# EAGLE board quahog-3-routed (EAGLE 7.6.0)
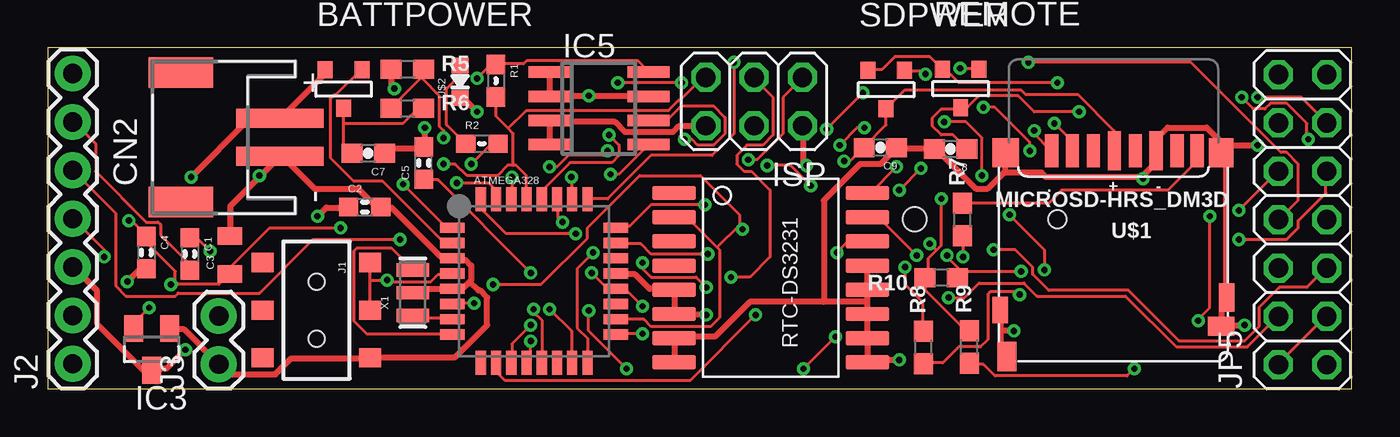
[diagram p0: board, top side]
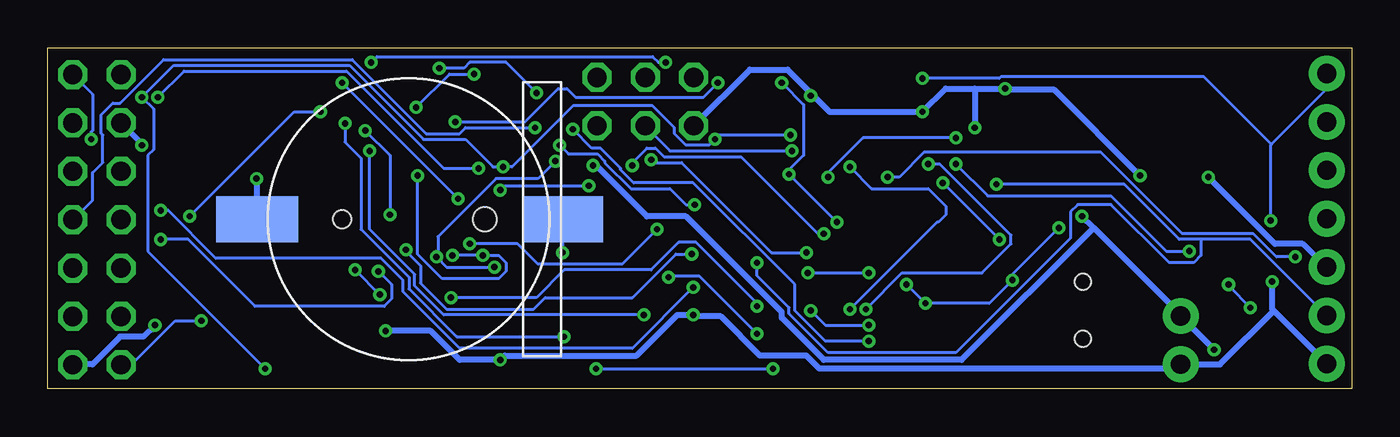
[diagram p1: board, bottom side, seen from below]

Size 68.5 x 17.92 mm. Coordinates in mm from the lower left corner, seen from the top.
Outline: 0,0 68.5,0 68.5,17.92 0,17.92 0,0
Copper layers (1*16): Top 0.0356mm / dielectric 1.5011mm / Bottom 0.0356mm
Design rules "oshpark-2layer": minimum track width 6mil, minimum drill 13mil, track to track 6mil, track to pad 6mil, pad to pad 6mil, via to via 6mil, smd to smd 6mil, copper to edge 15mil, drill to drill 6mil, minimum pad ring 7mil, minimum via ring 7mil, stop-mask expansion 2.5mil, vias tented up to drill 0mil, thermal gap 10mil
Net classes: 1 power: width 0.305 mm

## Footprints (pad centres in the part's own frame; a part is rotated, then mirrored left to right if it is on the bottom)
TQFP32-08 = smd 1.27 x 0.533: 1 -4.293,2.8; 2 -4.293,2; 3 -4.293,1.2; 4 -4.293,0.4; 5 -4.293,-0.4; 6 -4.293,-1.2; 7 -4.293,-2; 8 -4.293,-2.8; 17 4.293,-2.8; 18 4.293,-2; 19 4.293,-1.2; 20 4.293,-0.4; 21 4.293,0.4; 22 4.293,1.2; 23 4.293,2; 24 4.293,2.8 | smd 0.533 x 1.27: 9 -2.8,-4.293; 10 -2,-4.293; 11 -1.2,-4.293; 12 -0.4,-4.293; 13 0.4,-4.293; 14 1.2,-4.293; 15 2,-4.293; 16 2.8,-4.293; 25 2.8,4.293; 26 2,4.293; 27 1.2,4.293; 28 0.4,4.293; 29 -0.4,4.293; 30 -1.2,4.293; 31 -2,4.293; 32 -2.8,4.293
BATTCON_12MM_SMT = smd 2.4 x 4.3: P$1 0,11.96 | smd 2.4 x 4.2: P$2 0,-4.1 | hole 0.95: 0,7.5 | hole 1.25: 0,0
SOT-23 = smd 0.787 x 0.889: 1 0.025,-1.016; 2 -0.94,1.016; 3 0.991,1.016
0603-CAP = smd 1.016 x 0.965: 1 -0.85,0; 2 0.85,0
0805-CAP = smd 0.902 x 1.3: 1 -1,0; 2 1,0
0603-CAP' = smd 1.1 x 1: 1 -0.85,0; 2 0.85,0
JST-PH-2-SMT-RA = smd 1 x 4.6: 1 1,-3.7; 2 -1,-3.7 | smd 1.6 x 3.4: NC1 -3.4,1.5; NC2 3.4,1.5
SOT23 = smd 1 x 1.4: 1 -0.95,-1.1; 2 0.95,-1.1; 3 0,1.1
SO-08 = smd 0.6 x 2.2: 1 -1.905,-2.6; 2 -0.635,-2.6; 3 0.635,-2.6; 4 1.905,-2.6; 5 1.905,2.6; 6 0.635,2.6; 7 -0.635,2.6; 8 -1.905,2.6
2X03 = drill 1.016 octagon: 1 -2.54,-1.27; 2 -2.54,1.27; 3 0,-1.27; 4 0,1.27; 5 2.54,-1.27; 6 2.54,1.27
AYZ0202 = smd 1 x 1.15: 1 -2.5,2.825; 2 0,2.825; 3 2.5,2.825; 4 -2.5,-2.825; 5 0,-2.825; 6 2.5,-2.825 | hole 0.85: 1.5,0; -1.5,0
1X07 = drill 1.016 pad 1.88: 1 0,0; 2 2.54,0; 3 5.08,0; 4 7.62,0; 5 10.16,0; 6 12.7,0; 7 15.24,0
1X02 = drill 1.016 pad 1.88: 1 0,0; 2 2.54,0
2X07 = drill 1.016 octagon: 1 -7.62,-1.27; 2 -7.62,1.27; 3 -5.08,-1.27; 4 -5.08,1.27; 5 -2.54,-1.27; 6 -2.54,1.27; 7 0,-1.27; 8 0,1.27; 9 2.54,-1.27; 10 2.54,1.27; 11 5.08,-1.27; 12 5.08,1.27; 13 7.62,-1.27; 14 7.62,1.27
0603-RES = smd 1.016 x 0.965: 1 -0.85,0; 2 0.85,0
0603-NO = smd 1.1 x 1: 1 -0.85,0; 2 0.85,0
DS3231 = smd 0.762 x 2.286: 1 -4.445,-5.08; 2 -3.175,-5.08; 3 -1.905,-5.08; 4 -0.635,-5.08; 5 0.635,-5.08; 6 1.905,-5.08; 7 3.175,-5.08; 8 4.445,-5.08; 9 4.445,5.08; 10 3.175,5.08; 11 1.905,5.08; 12 0.635,5.08; 13 -0.635,5.08; 14 -1.905,5.08; 15 -3.175,5.08; 16 -4.445,5.08
DM3D = smd 0.7 x 1.75: CD/DAT3 8.15,0.45; CLK 4.85,0.45; CMD 7.05,0.45; DAT0 2.65,0.45; DAT1 1.6,0.45; DAT2 9.25,0.45 | smd 0.8 x 1.5: GND1 0.05,8.15 | smd 0.8 x 1.4: GND2 11.95,8.8 | smd 1.4 x 1.5: GND3 11.65,0.55 | smd 1.3 x 1.5: GND4 0.35,0.55 | smd 1 x 1.55: SW_A 11.6,11.25 | smd 1.4 x 1: SW_B 0.35,9.65 | smd 0.7 x 2.032: VDD 5.95,0.45; VSS 3.75,0.45
0603-LED = smd 0.8 x 0.9: MINUS -0.85,0; PLUS 0.85,0
RESONATOR-SMD = smd 0.7 x 1.7: 1 -1.2,0; 2 0,0; 3 1.2,0

## Placement (x,y rotation side)
ATMEGA328  ATMega-328  [TQFP32-08]  25.55,5.66 0 top
BAT  CR1220  [BATTCON_12MM_SMT]  45.54,8.92 90 bottom
BATTPOWER  FDN340P  [SOT-23]  15.52,15.75 0 top
C1  0.1  [0603-CAP]  7.47,7.09 270 top
C2  1u  [0603-CAP]  16.66,9.55 0 top
C3  10u  [0805-CAP]  9.58,7.04 90 top
C4  0.1  [0603-CAP]  5.18,7.16 270 top
C5  0.1  [0603-CAP]  19.76,11.86 90 top
C7  0.1uF  [0603-CAP']  16.84,12.37 180 top
C8  0.1uF  [0603-CAP']  47.42,12.6 180 top
C9  0.1uF  [0603-CAP']  43.74,12.67 180 top
CN2  [JST-PH-2-SMT-RA]  8.51,13.21 90 top
IC3  MCP1703CB  [SOT23]  5.46,2.08 180 top
IC5  24AA128SN  [SO-08]  28.96,14.73 270 top
ISP  [2X03]  37.11,15.09 180 top
J1  AYZ0202  [AYZ0202]  14.12,4.14 270 top
J2  [1X07]  1.32,1.32 90 top
J3  [1X02]  8.99,1.3 90 top
JP5  [2X07]  65.91,8.89 90 top
R1  10k  [0603-RES]  23.55,16.18 270 top
R2  1k5  [0603-RES]  22.81,12.88 0 top
R5  100K  [0603-NO]  18.9,16.79 0 top
R6  100K  [0603-NO]  18.9,14.73 0 top
R7  10K  [0603-NO]  48.06,8.89 90 top
R8  10K  [0603-NO]  46,2.18 90 top
R9  1.4K  [0603-NO]  48.41,2.21 90 top
R10  1.4K  [0603-NO]  46.94,5.84 180 top
REMOTE  FDN340P  [SOT-23]  47.93,15.77 0 top
RTC-DS3231  DS3231  [DS3231]  37.97,5.84 270 top
SDPWER  FDN340P  [SOT-23]  44.02,15.72 0 top
U$1  MICROSD-HRS_DM3D  [DM3D]  61.98,12.95 180 top
U$2  LED0603  [0603-LED]  21.67,16.13 90 top
X1  16 MHz  [RESONATOR-SMD]  19.18,5.05 90 top

## Library data of the parts
ATMEGA328 C1-C5 R1 R2 U$2 = LowPowerLab
BAT J1 = SparkFunNew
BATTPOWER REMOTE SDPWER = zetex; OC_FARNELL: unknown; OC_NEWARK: unknown
C7-C9 X1 = SparkFun
CN2 = adafruit
IC3 = linear
IC5 = microchip; MF: MICROCHIP; MPN: 24AA128-I/SN; OC_FARNELL: unknown; OC_NEWARK: 92C6842
ISP JP5 = pinhead
J2 J3 = SparkFun-Connectors
R5-R10 = microbuilder
RTC-DS3231 = _lh-library
U$1 = hrs_DM3D-SF

## Nets
A0: ATMEGA328.23 JP5.5
A1: ATMEGA328.24 JP5.7
A2: ATMEGA328.25 JP5.8
A3: ATMEGA328.26 R5.2 R6.1
A6: ATMEGA328.19
A7: ATMEGA328.22
AREF: ATMEGA328.20 C5.1 JP5.4
D0_RX: ATMEGA328.30 J2.4
D1_TX: ATMEGA328.31 J2.5
D2: ATMEGA328.32 JP5.13
D3: ATMEGA328.1 J2.2 JP5.10
D4: ATMEGA328.2 BATTPOWER.3
D5: ATMEGA328.9
D5/RTC: RTC-DS3231.3
D6: ATMEGA328.10 SDPWER.3
D7: ATMEGA328.11 U$1.CD/DAT3
D8: ATMEGA328.12 REMOTE.3
D9: ATMEGA328.13 R2.2
D10: JP5.6
D10_SS: ATMEGA328.14
D11_MOSI: ATMEGA328.15 ISP.4
D12_MISO: ATMEGA328.16 ISP.1
D13_SCK: ATMEGA328.17 ISP.3
GND [power]: ATMEGA328.3 ATMEGA328.5 ATMEGA328.21 BAT.P$1 C2.2 C3.2 C4.2 C5.2 C7.1 C8.2 C9.1 CN2.2 IC3.1 IC5.1 IC5.2 IC5.3 IC5.4 IC5.7 ISP.6 J1.3 J2.1 J3.1 JP5.1 JP5.12 R5.1 RTC-DS3231.5 RTC-DS3231.6 RTC-DS3231.7 RTC-DS3231.8 RTC-DS3231.9 RTC-DS3231.10 RTC-DS3231.11 RTC-DS3231.12 RTC-DS3231.13 U$1.GND1 U$1.GND2 U$1.GND3 U$1.GND4 U$1.SW_A U$1.SW_B U$1.VSS U$2.MINUS X1.2
MISO: U$1.DAT0
MOSI: U$1.CMD
N$1: ATMEGA328.7 X1.1
N$2: R2.1 U$2.PLUS
N$4: C9.2 R7.1 R8.2 SDPWER.1 U$1.VDD
N$7: C8.1 JP5.2 JP5.3 REMOTE.1
N$15: BATTPOWER.1 C7.2 R6.2
N$16: R7.2 U$1.DAT1
N$18: R8.1 U$1.DAT2
N$20: C1.2 J2.6
N$21: ATMEGA328.8 X1.3
PWR [power]: BATTPOWER.2 C2.1 CN2.1 IC3.3 ISP.2 J2.3 J3.2
RST: ATMEGA328.29 C1.1 ISP.5 R1.2
RTC_BATT: BAT.P$2 RTC-DS3231.14
SCK: U$1.CLK
SCL: ATMEGA328.28 IC5.6 JP5.11 R9.1 RTC-DS3231.16
SDA: ATMEGA328.27 IC5.5 JP5.9 R10.1 RTC-DS3231.15
VBAT [power]: JP5.14
VCC: ATMEGA328.4 ATMEGA328.6 ATMEGA328.18 C3.1 C4.1 IC3.2 IC5.8 J1.1 J1.2 J2.7 R1.1 R9.2 R10.2 REMOTE.2 RTC-DS3231.2 SDPWER.2

## Tracks (layer width: path | path; a pad name or v marks a point on that pad's centre or on a via)
A0  (via drill 0.33)
  Top 0.152: v34.67,7.09 31.7,7.09 31.17,7.62 29.87,7.62 ATMEGA328.23 | v49.68,7.32 50.83,7.32 51.74,6.4 51.74,6.02 52.58,5.18 56.77,5.18 59.44,2.52 62.87,2.52 63.63,3.28 63.63,4.27 64.69,5.33 66.14,5.33 67.13,6.33 JP5.5
  Bottom 0.152: v34.67,7.09 35.51,7.09 37.8,4.8 42.37,4.8 42.98,4.19 47.55,4.19 48.92,5.56 48.92,6.48 49.68,7.24 v49.68,7.32
A1  (via drill 0.33)
  Top 0.152: v34.52,9.68 31.7,9.68 30.56,8.53 29.87,8.53 ATMEGA328.24 | v41.61,12.8 42.52,13.72 v42.9,13.72
  Bottom 0.152: v34.52,9.68 34.98,9.68 35.81,10.52 37.87,10.52 39.24,11.89 39.24,11.96 39.62,12.34 41.15,12.34 v41.61,12.8 | v42.9,13.72 46.56,13.72 46.86,13.41 48.62,13.41 52.5,17.3 62.41,17.3 64.69,15.01 65.07,15.01 65.68,14.4 65.68,13.41 65.61,13.34 65.61,11.89 66.14,11.35 66.14,9.91 67.13,8.91 JP5.7
A2  (via drill 0.33)
  Top 0.152: v36.04,17.14 36.04,13.41 34.9,12.27 31.7,12.27 29.41,9.98 28.42,9.98 ATMEGA328.25 | v51.51,17.14 60.05,17.14 64.77,12.42 65.07,12.42 65.68,11.81 65.68,9.91 64.69,8.91 JP5.8
  Bottom 0.152: v36.04,17.14 36.42,17.14 36.73,17.45 51.21,17.45 v51.51,17.14
A3  (via drill 0.33)
  Top 0.152: R6.1 18.06,14.78 19.74,16.46 19.74,16.76 R5.2 19.66,16.31 20.57,15.39 20.57,13.79 20.8,13.56 v20.8,13.18 | v27.51,11.12 27.51,9.98 ATMEGA328.26
  Bottom 0.152: v27.51,11.12 27.51,11.35 25.68,13.18 v20.8,13.18
AREF  (via drill 0.33)
  Top 0.152: v25.37,6.1 20.5,10.97 19.81,10.97 C5.1 | v28.57,6.1 29.34,5.33 29.79,5.33 ATMEGA328.20 29.87,5.26 30.33,5.26 v31.24,4.34 | v47.32,4.8 48.16,4.8 48.92,5.56 51.28,5.56 51.97,4.88 56.62,4.88 59.28,2.21 63.02,2.21 64.62,3.81 JP5.4
  Bottom 0.152: v28.57,6.1 v25.37,6.1 | v47.32,4.8 42.82,4.8 41.38,6.25 36.8,6.25 35.36,7.7 34.44,7.7 31.24,4.5 v31.24,4.34
D0_RX  (via drill 0.33)
  Top 0.152: v24.38,11.12 24.38,9.98 ATMEGA328.30 | v2.97,6.93 2.97,7.32 1.37,8.91 J2.4
  Bottom 0.152: v24.38,11.12 23.77,11.12 22.48,12.42 13.18,12.42 8.91,8.15 5.18,8.15 3.96,6.93 v2.97,6.93
D1_TX  (via drill 0.33)
  Top 0.152: v21.49,10.82 23.16,10.82 23.55,10.44 23.55,9.98 ATMEGA328.31 | v18.52,7.85 13.95,7.85 11.12,5.03 6.86,5.03 6.71,4.88 4.11,4.88 3.58,5.41 3.58,9.22 J2.5
  Bottom 0.152: v18.52,7.85 v21.49,10.82
D2  (via drill 0.33)
  Top 0.152: v27.74,8.15 24.08,8.15 22.78,9.45 22.78,9.91 ATMEGA328.32 | v37.8,11.73 39.01,11.73 v40.08,10.67 | v45.87,11.58 v44.73,10.44 | v62.71,15.32 63.32,14.71 63.93,14.71 64.24,15.01 65.07,15.01 66.14,13.95 66.14,13.18 v66.22,13.11
  Bottom 0.152: v27.74,8.15 28.04,8.15 32.08,12.19 36.12,12.19 36.58,12.65 37.03,12.65 37.8,11.89 v37.8,11.73 | v40.08,10.67 44.5,10.67 v44.73,10.44 | v45.87,11.58 47.7,11.58 52.81,16.69 61.34,16.69 v62.71,15.32 | v66.22,13.11 66.22,13.49 66.14,13.56 66.14,15.47 JP5.13
D3  (via drill 0.33)
  Top 0.152: v18.67,10.74 20.88,8.53 21.26,8.53 ATMEGA328.1 | v62.56,9.37 64.62,11.43 JP5.10 | v34.6,5.33 34.06,5.87 31.7,5.87 31.24,6.33 v31.24,6.63
  Bottom 0.152: v18.67,10.74 11.96,10.74 9.07,7.85 7.92,7.85 | 7.92,7.85 5.33,7.85 1.37,3.89 J2.2 | v62.56,9.37 62.18,9.37 59.66,6.86 50.98,6.86 49.84,5.71 49.84,5.11 46.86,2.13 37.8,2.13 v34.6,5.33 | v31.24,6.63 31.24,5.94 29.57,4.27 29.57,3.96 27.51,1.91 20.8,1.91 14.78,7.92 14.78,9.3 14.4,9.68 12.65,9.68 9.6,6.63 8.31,6.63 7.92,7.01 7.92,7.85
D4
  Top 0.152: BATTPOWER.3 16.46,16.76 15.16,15.47 15.09,15.47 14.86,15.24 14.86,12.12 16.08,10.9 17.6,10.9 20.8,7.7 21.26,7.7 ATMEGA328.2
D6  (via drill 0.33)
  Top 0.152: v46.1,16.54 45.95,16.69 45.03,16.69 SDPWER.3 | v49.15,14.78 49.76,14.78 51.59,12.95 v51.59,12.5 | v37.19,3.89 33.76,0.46 24,0.46 23.62,0.84 23.62,1.37 ATMEGA328.10
  Bottom 0.152: v46.1,16.54 47.4,16.54 v49.15,14.78 | v51.59,12.5 51.59,8.38 49.23,6.02 49.23,5.41 47.7,3.89 v37.19,3.89
D7  (via drill 0.33)
  Top 0.152: v25.37,3.35 24.38,2.36 24.38,1.37 ATMEGA328.11 | v28.42,4.12 28.42,3.05 v30.4,1.07 | v41.38,2.74 v39.7,1.07 | v52.88,13.95 53.8,13.03 53.8,12.57 U$1.CD/DAT3
  Bottom 0.152: v25.37,3.35 27.66,3.35 v28.42,4.12 | v39.7,1.07 v30.4,1.07 | v41.38,2.74 47.02,2.74 49.53,5.26 49.53,5.87 52.05,8.38 52.05,12.12 52.88,12.95 v52.88,13.95
D8  (via drill 0.33)
  Top 0.152: v47.93,16.84 48.92,16.84 REMOTE.3 | v40.92,13.64 v42.82,15.54 | v25.37,2.52 25.37,1.52 25.22,1.37 ATMEGA328.12
  Bottom 0.152: v47.93,16.84 46.63,16.84 46.33,17.14 44.43,17.14 v42.82,15.54 | v40.92,13.64 39.93,12.65 39.47,12.65 38.41,11.58 38.41,11.51 37.72,10.82 34.6,10.82 29.26,5.49 29.26,4.12 27.66,2.52 v25.37,2.52
D9  (via drill 0.33)
  Top 0.152: R2.2 23.32,12.88 v22.25,11.81 | v25.53,4.19 25.53,4.04 25.98,3.58 25.98,1.37 ATMEGA328.13
  Bottom 0.152: v22.25,11.81 21.64,11.81 17.91,8.08 17.91,7.62 19.43,6.1 23.62,6.1 v25.53,4.19
D11_MOSI  (via drill 0.33)
  Top 0.152: v26.36,4.19 27.51,3.05 27.51,1.37 ATMEGA328.15 | v26.36,11.66 26.75,11.66 27.36,12.27 29.18,12.27 v29.41,12.5
  Bottom 0.152: v26.36,4.19 21.79,8.76 21.72,8.76 21.34,9.14 21.34,9.6 22.25,10.52 25.22,10.52 v26.36,11.66 | v29.41,12.5 35.81,12.5 37.11,13.79 ISP.4
D12_MISO  (via drill 0.33)
  Top 0.152: v28.65,7.16 27.81,6.33 27.81,3.2 28.35,2.67 ATMEGA328.16 | v36.8,12.04 37.26,12.04 38.63,13.41 38.63,15.32 39.62,16.31 ISP.1
  Bottom 0.152: v28.65,7.16 30.48,7.16 35.2,11.89 36.65,11.89 v36.8,12.04
D13_SCK  (via drill 0.33)
  Top 0.152: v31.24,2.9 29.87,2.9 ATMEGA328.17 | v35.89,5.87 36.88,5.87 37.95,6.93 37.95,10.44 36.96,11.43 36.58,11.43 36.2,11.81 36.2,12.27 36.73,12.8 37.57,12.8 38.1,13.34 38.1,15.32 37.11,16.31 ISP.3
  Bottom 0.152: v31.24,2.9 34.29,5.94 35.81,5.94 v35.89,5.87
GND  (via drill 0.33)
  Top 0.305: ATMEGA328.21 29.87,6.02 30.86,6.02 31.62,5.26 32.84,5.26 RTC-DS3231.5 32.92,5.11 32.92,3.96 RTC-DS3231.6 33,3.89 v34.6,3.89 | RTC-DS3231.8 32.92,1.45 32.92,2.67 RTC-DS3231.7 33,2.74 35.05,2.74 36.88,4.57 40.77,4.57 | 50.06,3.05 50.06,2.06 50.37,1.75 U$1.SW_A | 50.06,3.05 50.06,4.12 U$1.GND2 | 43.05,4.57 RTC-DS3231.11 RTC-DS3231.10 RTC-DS3231.9 43.13,1.52 v44.73,1.52 | 43.05,4.57 RTC-DS3231.12 RTC-DS3231.13 | v50.75,3.05 50.06,3.05 | 43.05,4.57 40.77,4.57 | 50.29,11.43 50.29,12.34 U$1.GND3 | 50.29,11.43 49.38,10.52 48.77,10.52 46.71,12.57 C8.2 46.56,12.65 44.65,12.65 C9.1 44.5,12.57 43.74,11.81 42.67,11.81 40.77,9.91 40.77,4.57 | U$1.GND4 61.57,12.42 61.57,13.03 60.88,13.72 58.83,13.72 58.29,13.18 58.29,12.57 U$1.VSS 58.14,12.42 58.14,11.81 57.46,11.12 | U$1.GND4 61.65,12.27 61.87,12.04 61.87,4.95 U$1.GND1 61.87,4.8 61.65,4.57 61.65,3.35 U$1.SW_B 61.8,3.35 v62.87,3.35 | v63.55,12.8 61.65,12.8 U$1.GND4 | 57.46,11.12 52.43,11.12 52.2,11.35 50.37,11.35 50.29,11.43 | v57.53,11.05 57.46,11.12 | IC5.1 26.36,16.61 26.36,15.39 IC5.2 26.52,15.39 v28.42,15.39 31.55,15.39 IC5.7 | IC5.4 26.36,12.88 IC5.3 26.44,14.02 29.79,14.02 30.33,13.49 32.84,13.49 33.15,13.79 34.52,13.79 ISP.6 | C7.1 17.75,12.42 17.98,12.65 19.74,12.65 C5.2 19.81,12.8 v19.81,13.72 | v22.55,14.55 21.87,15.24 21.72,15.24 U$2.MINUS | v18.21,15.77 18.06,15.93 18.06,16.76 R5.1 | X1.2 19.2,5.11 19.36,5.26 ATMEGA328.5 21.34,5.33 21.87,5.33 22.17,5.64 | 22.17,5.64 22.25,5.71 22.25,6.48 21.95,6.78 21.34,6.78 ATMEGA328.3 21.26,6.93 20.65,6.93 18.06,9.53 17.53,9.53 C2.2 17.37,9.6 17.22,9.6 16.31,10.52 14.02,10.52 12.34,12.19 CN2.2 12.19,12.19 11.16,11.16
  Top 0.305: 11.16,11.16 9.6,9.6 9.6,8.08 C3.2 | v4.19,5.64 4.8,6.25 5.18,6.25 C4.2 | IC3.1 6.48,3.12 7.16,3.12 J3.1 9.52,0.76 11.96,0.76 12.8,1.6 16.92,1.6 J1.3 17.07,1.68 21.41,1.68 23.09,3.35 23.09,4.8 22.71,5.18 22.63,5.18 22.17,5.64 | v11.12,11.2 11.16,11.16
  Bottom 0.305: v50.75,3.05 48.39,3.05 46.86,1.52 v44.73,1.52 44.5,1.75 37.57,1.75 35.43,3.89 v34.6,3.89 34.52,3.81 33.15,3.81 31.09,1.75 28.65,1.75 27.96,1.07 9.22,1.07 J3.1 6.93,1.29 4.11,4.12 | JP5.12 63.55,12.88 v63.55,12.8 | v62.87,3.35 63.48,2.74 64.69,2.74 66.14,1.29 67.13,1.29 JP5.1 | v57.53,11.05 57.53,8.91 BAT.P$1 | 28.35,15.47 29.64,16.76 31.62,16.76 ISP.6 | 28.35,15.47 27.43,14.55 v22.55,14.55 21.34,15.77 19.81,15.77 | 19.81,15.77 v18.21,15.77 18.14,15.7 15.62,15.7 v11.12,11.2 | 19.81,15.77 v19.81,13.72 | v28.42,15.39 28.35,15.47 | v4.19,5.64 4.19,4.19 4.11,4.12 | J2.1 4.11,4.12
N$1
  Top 0.152: ATMEGA328.7 21.26,3.73 19.28,3.73 19.2,3.81 X1.1
N$2
  Top 0.152: U$2.PLUS 21.64,16.92 21.64,16.46 20.95,15.77 20.95,13.87 21.95,12.88 R2.1
N$4  (via drill 0.33)
  Top 0.152: v45.03,6.4 45.03,5.49 45.95,4.57 45.95,3.05 R8.2 | v48.08,6.93 48.08,8 R7.1 | U$1.VDD 56.01,12.57 56.01,13.56 54.1,15.47 51.36,15.47 51.13,15.7 45.03,15.7 SDPWER.1 44.04,13.87 42.9,12.72 C9.2 42.82,12.65 42.14,11.96 v41.83,11.96
  Bottom 0.152: v45.03,6.4 47.55,6.4 v48.08,6.93 48.01,6.93 48.01,8 44.96,11.05 42.75,11.05 v41.83,11.96
N$7  (via drill 0.33)
  Top 0.152: C8.1 48.23,12.65 47.55,13.34 46.94,13.34 46.48,13.79 46.48,14.25 46.94,14.71 47.93,14.71 REMOTE.1 48.01,14.78 48.31,14.78 48.92,15.39 50.98,15.39 51.82,14.55 v54.18,14.55 | v61.04,9.07 61.04,4.27 60.43,3.66 v60.43,3.58 | JP5.3 67.13,3.81 64.62,1.29 JP5.2
  Bottom 0.152: v54.18,14.55 55.55,14.55 v61.04,9.07 | v60.43,3.58 61.8,3.58 64.08,1.29 64.62,1.29 JP5.2
N$15
  Top 0.152: 15.54,13.95 15.54,12.8 15.93,12.42 C7.2 | 15.54,13.95 BATTPOWER.1 | 15.54,13.95 18.67,13.95 19.43,14.71 19.74,14.71 R6.2
N$16
  Top 0.152: R7.2 48.08,9.75 52.58,9.75 53.26,10.44 58.83,10.44 60.35,11.96 60.35,12.5 U$1.DAT1
N$18  (via drill 0.33)
  Top 0.152: v51.05,4.95 50.9,5.11 49.53,5.11 49.38,4.95 49.38,2.59 49,2.21 47.85,2.21 47.02,1.37 46.03,1.37 R8.1 | v52.35,6.25 52.35,7.32 v50.52,9.14 | v51.82,13.56 51.82,13.41 52.65,12.57 U$1.DAT2
  Bottom 0.152: v52.35,6.25 v51.05,4.95 | v50.52,9.14 50.52,12.27 v51.82,13.56
N$20
  Top 0.152: C1.2 7.47,6.55 5.94,8.08 5.94,8.61 5.79,8.76 5.18,8.76 2.51,11.43 2.51,12.88 1.37,14.02 J2.6
N$21
  Top 0.152: ATMEGA328.8 21.26,2.9 16.76,2.9 16.08,3.58 16.08,7.24 16.23,7.39 18.06,7.39 19.13,6.33 X1.3
PWR  (via drill 0.33)
  Top 0.305: BATTPOWER.2 14.55,16.76 14.55,16.54 12.27,14.25 CN2.1 12.12,14.1 10.52,14.1 v7.54,11.12 | J2.3 1.37,6.4 2.59,5.18 2.59,3.43 5.03,0.99 5.41,0.99 IC3.3 5.56,1.07 6.25,1.07 v7.24,2.06 | v14.17,9.07 14.63,9.53 15.77,9.53 C2.1 | v39.85,11.73 39.7,11.89 39.7,13.79 ISP.2
  Bottom 0.305: v7.54,11.12 4.04,7.62 2.59,7.62 1.37,6.4 J2.3 | 13.56,8.46 8.99,3.89 J3.2 8.91,3.73 v7.24,2.06 | 13.56,8.46 v14.17,9.07 | v39.85,11.73 39.7,11.73 37.03,9.07 34.98,9.07 29.95,4.04 29.95,3.73 27.74,1.52 20.5,1.52 13.56,8.46
RST  (via drill 0.33)
  Top 0.152: v8.53,7.24 7.85,7.92 7.47,7.92 C1.1 | v20.8,11.81 21.41,11.81 22.02,11.2 23.62,11.2 24.15,11.73 24.46,11.73 | 24.46,11.73 24.61,11.73 25.15,11.2 25.15,9.98 ATMEGA328.29 | R1.2 23.55,14.33 24.19,13.68 | 24.19,13.68 24.46,13.41 24.46,11.73 | 24.19,13.68 25.15,14.63 32.61,14.63 33.15,15.16 33.22,15.16 34.37,16.31 34.52,16.31 ISP.5
  Bottom 0.152: v8.53,7.24 9.75,7.24 12.65,10.13 19.13,10.13 v20.8,11.81
RTC_BATT  (via drill 0.33)
  Top 0.152: v41.45,7.16 41.99,7.7 43.05,7.7 RTC-DS3231.14
  Bottom 0.152: v41.45,7.16 41.45,8.91 BAT.P$2
SCL  (via drill 0.33)
  Top 0.152: v29.49,13.34 30.02,12.8 30.02,12.27 29.64,11.89 27.43,11.89 25.98,10.44 25.98,9.98 ATMEGA328.28 | v33.45,13.11 33.83,13.11 34.14,12.8 34.98,12.8 35.59,13.41 35.59,14.25 34.98,14.86 33.3,14.86 32.54,14.1 IC5.6 | RTC-DS3231.16 43.21,10.29 v44.58,11.66 | v57.07,1.07 56.69,0.69 49.76,0.69 49.15,1.29 48.46,1.29 R9.1 | v63.55,15.32 65.84,15.32 JP5.11
  Bottom 0.152: v29.49,13.34 33.22,13.34 v33.45,13.11 33.76,12.8 34.98,12.8 35.59,13.41 35.59,13.72 36.73,14.86 40.92,14.86 44.12,11.66 v44.58,11.66 45.11,11.66 46.56,13.11 48.77,13.11 52.65,16.99 61.87,16.99 v63.55,15.32 62.94,14.71 62.94,12.57 63.25,12.27 63.25,7.24 v57.07,1.07
SDA  (via drill 0.33)
  Top 0.152: v27.05,8.76 26.82,8.99 26.82,9.91 ATMEGA328.27 | v29.57,11.28 30.02,11.28 31.55,12.8 IC5.5 | 47.78,6.17 47.78,6.4 47.24,6.93 v47.24,7.01 | 47.78,6.17 47.78,5.87 R10.1 47.78,6.17 | v45.64,7.01 43.66,8.99 43.05,8.99 RTC-DS3231.15 | v62.56,7.85 65.07,7.85 65.68,8.46 65.68,8.84 67.13,10.29 67.13,11.43 JP5.9 | 47.78,6.17 v51.13,6.17 | v33.3,16.08 v29.95,16.08 | v47.09,14.02 48.23,14.02 49.07,13.18 v49.07,11.2
  Bottom 0.152: v27.05,8.76 v29.57,11.28 29.49,11.28 29.49,11.58 28.8,12.27 28.8,14.94 v29.95,16.08 | v47.24,7.01 v45.64,7.01 44.81,7.01 44.43,6.63 44.43,6.17 44.81,5.79 47.78,5.79 49.07,7.09 v49.07,11.2 | v62.56,7.85 61.11,7.85 57.61,4.34 50.83,4.34 50.44,4.72 50.44,5.49 v51.13,6.17 | v33.3,16.08 34.06,15.32 40.77,15.32 41.22,15.77 41.68,15.77 43.43,14.02 v47.09,14.02
VCC  (via drill 0.33)
  Top 0.152: SDPWER.2 43.13,16.76 43.82,16.76 44.5,17.45 46.33,17.45 REMOTE.2 47.02,16.76 47.17,16.76 47.85,16.08 v53.04,16.08 | R9.2 48.39,3.12 48.16,3.12 46.1,5.18 46.1,5.79 R10.2 46.1,5.87 46.25,6.02 46.25,6.86 46.67,7.28 | v46.94,9.98 46.94,7.54 46.67,7.28 | 35.17,7.43 33.6,8.99 32.92,8.99 RTC-DS3231.2 | 35.17,7.43 35.28,7.32 35.28,3.73 34.82,3.28 31.7,3.28 31.32,3.66 29.87,3.66 ATMEGA328.18 | IC5.8 31.55,16.69 31.01,17.22 25.15,17.22 24.99,17.07 23.55,17.07 R1.1 23.55,16.99 23.24,16.99 v22.55,16.31 | 16.92,5.71 16.92,6.63 J1.1 | 16.92,5.71 16.92,4.19 J1.2 | v22.4,4.5 21.26,4.5 ATMEGA328.6 | 16.92,5.71 v17.83,5.71 17.91,5.64 20.12,5.64 20.5,6.02 21.26,6.02 ATMEGA328.4 | 6.82,5.52 6.86,5.49 8.99,5.49 9.52,6.02 C3.1 9.6,6.1 9.6,6.4 11.66,8.46 v15.39,8.46 | 6.82,5.52 6.71,5.64 6.71,6.17 5.18,7.7 C4.1 5.18,8.08 4.42,8.84 v4.27,8.84 | v5.33,4.27 4.57,3.5 4.57,3.2 IC3.2 | v6.48,5.49 6.78,5.49 6.82,5.52 | 36.31,8.57 36.35,8.61 36.35,9.14 34.29,11.2 31.09,11.2 28.35,8.46 28.35,7.92 25.91,5.49 v23.39,5.49 | 36.31,8.57 35.17,7.43 | v46.33,7.62 46.67,7.28 | 36.31,8.57 v36.5,8.38
  Bottom 0.152: v46.94,9.98 v53.04,16.08 | v5.33,4.27 6.48,5.41 v6.48,5.49 | v15.39,8.46 17.83,6.02 v17.83,5.71 19.05,4.5 v22.4,4.5 v23.39,5.49 | 4.23,12.84 4.27,12.8 v4.27,8.84 | 4.23,12.84 1.37,15.7 1.37,16.54 J2.7 | v22.55,16.31 18.52,16.31 18.44,16.38 7.77,16.38 4.23,12.84 | v46.33,7.62 43.82,7.62 42.75,6.55 38.33,6.55 v36.5,8.38